# Altium PCB 28Pins_Project_V1I1_PCB.PcbDoc (part 2 of 3)
Units mm, origin at the board's own origin, x right, y up, seen from the top; angles counter-clockwise.
Board outline 68.58 x 53.34 mm, 2 copper layers (L1, L2), stack 1.671 mm thick; 106 components, 71 nets, 323 pads, 106 vias.
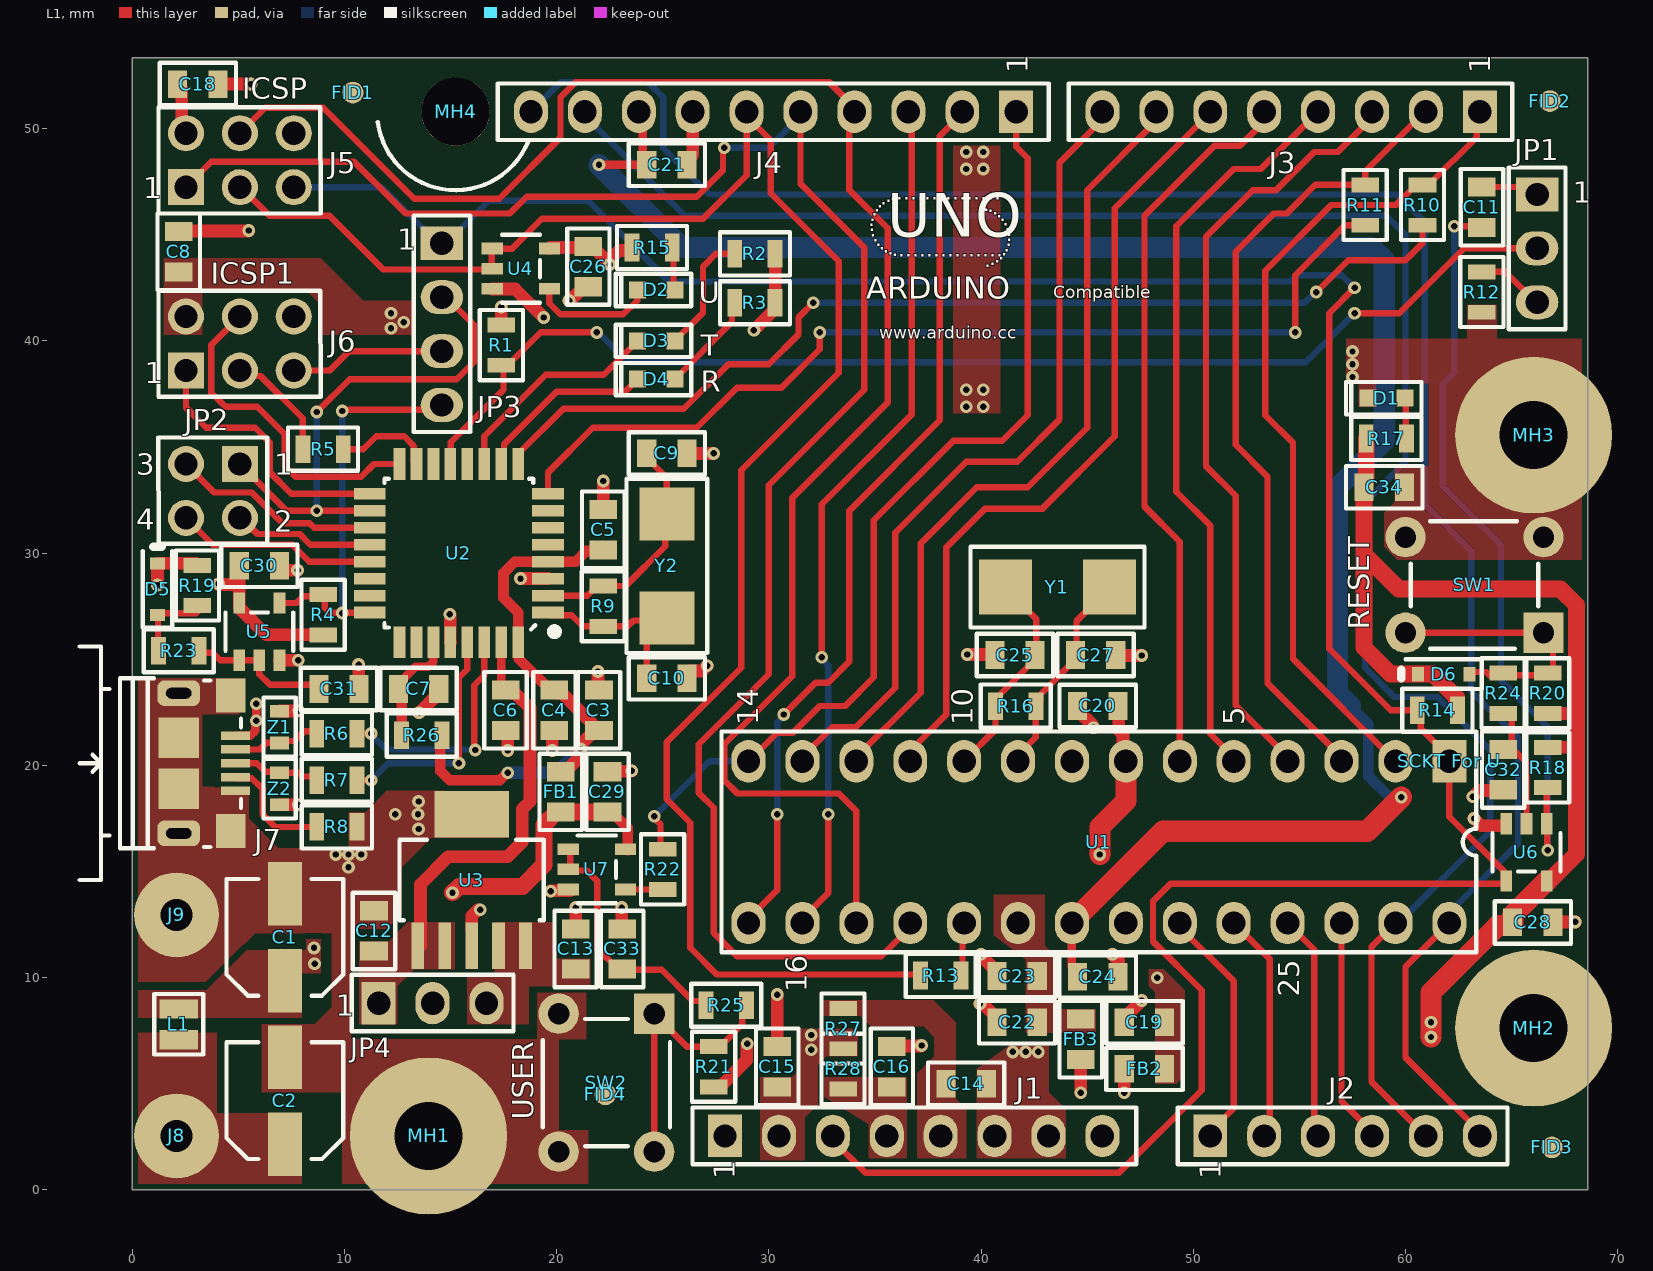
[diagram p0: L1 view]

## Part data (continued)
R4 R14 R18 R19 R20 R21: library part RC0805FR-0710KL, "Res Thick Film 0805 10K Ohm 1% 0.125W(1/8W) +/-100ppm/C Epoxy Pad SMD T/R", Case Code (Imperial)=0805, Case Code (Metric)=2012, Manufacturer=Yageo, Max Operating Temperature=155°C, Max Power Dissipation=125mW, Min Operating Temperature=-55°C, Package Quantity=1, Resistance Tolerance=1%, Resistor Type="Thick Film", Supplier Part Number=311-10.0KCRCT-ND, Temperature Coefficient=100ppm/°C, Voltage Rating=150V, Case/Package=0805, Category="Chip SMD Resistors", Construction=Rectangular, Depth=1.25mm, Features="Moisture Resistant", Height=0.024inch, Lead Free="Lead Free", Length=0.079inch, Manufacturer Part Number=RC0805FR-0710KL, Military Standard=Not, Number of Terminations=2, Packaging="Tape and Reel", Power Rating=125mW, Pricing="1=0.14, 10=0.016, 100=0.0112, 1000=0.00714 (USD)", Reach SVHC Compliant=Unknown, RoHS=Yes, RoHS Compliant=Yes, Series=RC, Stock=636782, Supplier=Digikey, Technology="THICK FILM", Termination=SMD/SMT, Tolerance=1%, Voltage Rating (AC)=150V, Width=0.049inch
R5 R6 R7 R13 R23 R24 R25: library part RC0805FR-0722RL, "SMD Chip Resistor, 22 Ohm, ± 1%, 125 mW, 0805 [2012 Metric], Thick Film, General Purpose", Manufacturer=Yageo, Supplier Part Number=311-22.0CRCT-ND, Voltage Rating (AC)=150V, Category="Chip SMD Resistors", ComponentLink1Description=https://datasheet.ciiva.com/11819/0900766b8106beab-11819837.pdf?src-supplier=Rs, ComponentLink1URL=https://datasheet.ciiva.com/11819/0900766b8106beab-11819837.pdf?src-supplier=Rs, ComponentLink2Description=https://datasheet.ciiva.com/2457/pyu-r-int-thick-7-2457045.pdf?src-supplier=Digikey, ComponentLink2URL=https://datasheet.ciiva.com/2457/pyu-r-int-thick-7-2457045.pdf?src-supplier=Digikey, ComponentLink3Description=https://datasheet.ciiva.com/2457/pyu-r-int-thick-7-2457046.pdf?src-supplier=Digikey, ComponentLink3URL=https://datasheet.ciiva.com/2457/pyu-r-int-thick-7-2457046.pdf?src-supplier=Digikey, ComponentLink4Description=https://datasheet.ciiva.com/12667/rc0805-12667371.pdf?src-supplier=Mouser, ComponentLink4URL=https://datasheet.ciiva.com/12667/rc0805-12667371.pdf?src-supplier=Mouser, ComponentLink5Description=https://datasheet.ciiva.com/2457/pyu-r-int-thick-7-2457044.pdf?src-supplier=Digikey, ComponentLink5URL=https://datasheet.ciiva.com/2457/pyu-r-int-thick-7-2457044.pdf?src-supplier=Digikey, ComponentLink6Description=https://datasheet.ciiva.com/46447/444164-46447574.pdf?src-supplier=Element14, ComponentLink6URL=https://datasheet.ciiva.com/46447/444164-46447574.pdf?src-supplier=Element14, Lead Free=5697LeadFree, Manufacturer Part Number=RC0805FR-0722RL, Pricing="1=0.1, 10=0.012, 100=0.0112, 1000=0.00918, 2500=0.00652 (USD)", RoHS=Yes, Stock=257864, Supplier=Digikey
R8 R26 R27 R28: library part RC0805JR-070RL, "GENERAL PURPOSE CHIP RESISTOR Metal Glaze/thick Film, 0.125W, 0ohm, Surface Mount, 0805", Case Code (Imperial)=0805, Case Code (Metric)=2012, Manufacturer=Yageo, Max Operating Temperature=155°C, Max Power Dissipation=125mW, Min Operating Temperature=-55°C, Resistance Tolerance=5%, Resistor Type="Thick Film", Supplier Part Number=311-0.0ARCT-ND, Temperature Coefficient=200ppm/°C, Voltage Rating=150V, Case/Package=0805, Category="Chip SMD Resistors", ComponentLink1Description=https://datasheet.ciiva.com/11819/0900766b8106beab-11819430.pdf?src-supplier=Rs, ComponentLink1URL=https://datasheet.ciiva.com/11819/0900766b8106beab-11819430.pdf?src-supplier=Rs, ComponentLink2Description=https://datasheet.ciiva.com/7941/1738694-7941861.pdf?src-supplier=Element14, ComponentLink2URL=https://datasheet.ciiva.com/7941/1738694-7941861.pdf?src-supplier=Element14, ComponentLink3Description=https://datasheet.ciiva.com/7941/1738694-7941862.pdf?src-supplier=Element14, ComponentLink3URL=https://datasheet.ciiva.com/7941/1738694-7941862.pdf?src-supplier=Element14, ComponentLink4Description=https://datasheet.ciiva.com/7941/1738694-7941863.pdf?src-supplier=Element14, ComponentLink4URL=https://datasheet.ciiva.com/7941/1738694-7941863.pdf?src-supplier=Element14, Construction=Rectangular, Contact Plating=Tin,Matte, Depth=1.25mm, Features="Moisture Resistant", Height=0.5mm, Lead Free=5697LeadFree, Length=2mm, Manufacturer Part Number=RC0805JR-070RL, Military Standard=Not, Number of Terminations=2, Packaging="Tape and Reel", Pins=2, Power Rating=125mW, Pricing="1=0.1, 10=0.015, 25=0.0128, 50=0.011, 100=0.0097, 250=0.00812, 500=0.00716, 1000=0.00633 (USD)", Reach SVHC Compliant=Unknown, RoHS=Yes, RoHS Compliant=Yes, Series=RC, Stock=729669, Supplier=Digikey, Technology="THICK FILM", Termination=SMD/SMT, Tolerance=5%, Voltage Rating (DC)=150V, Width=1.25mm
R9 R16: library part RC0805FR-071ML, "125Mw Thick Film Resistors 100Ppm/ 1% 1M 0805 Chip Resistor Surface Mount Rohs", Case Code (Imperial)=0805, Case Code (Metric)=2012, Case/Package=Molded, Manufacturer=Yageo, Max Operating Temperature=155°C, Min Operating Temperature=-55°C, Power Rating=125mW, Resistance Tolerance=1%, Resistor Type="Thick Film", Supplier Part Number=311-1.00MCRCT-ND, Temperature Coefficient=250ppm/°C, Voltage Rating=150V, Category="Chip SMD Resistors", ComponentLink1Description=https://datasheet.ciiva.com/2519/pyu-r-int-thick-7-2519712.pdf?src-supplier=Digikey, ComponentLink1URL=https://datasheet.ciiva.com/2519/pyu-r-int-thick-7-2519712.pdf?src-supplier=Digikey, ComponentLink2Description=https://datasheet.ciiva.com/2519/pyu-r-int-thick-7-2519713.pdf?src-supplier=Digikey, ComponentLink2URL=https://datasheet.ciiva.com/2519/pyu-r-int-thick-7-2519713.pdf?src-supplier=Digikey, ComponentLink3Description=https://datasheet.ciiva.com/2519/pyu-r-int-thick-7-2519711.pdf?src-supplier=Digikey, ComponentLink3URL=https://datasheet.ciiva.com/2519/pyu-r-int-thick-7-2519711.pdf?src-supplier=Digikey, ComponentLink4Description=https://datasheet.ciiva.com/12666/rc0805-12666975.pdf?src-supplier=Mouser, ComponentLink4URL=https://datasheet.ciiva.com/12666/rc0805-12666975.pdf?src-supplier=Mouser, ComponentLink5Description=https://datasheet.ciiva.com/17419/rc0805-17419909.pdf?src-supplier=Future+Electronics, ComponentLink5URL=https://datasheet.ciiva.com/17419/rc0805-17419909.pdf?src-supplier=Future+Electronics, Construction=Rectangular, Depth=1.25mm, Lead Free="Lead Free", Length=2mm, Manufacturer Part Number=RC0805FR-071ML, Military Standard=Not, Packaging="Tape and Reel", Pricing="1=0.1, 10=0.014, 100=0.0112, 1000=0.00918, 2500=0.00617 (USD)", Reach SVHC Compliant=Unknown, RoHS=Yes, RoHS Compliant=Yes, Stock=175670, Supplier=Digikey, Tolerance=1%, Voltage Rating (AC)=150V
R10 R11 R12: library part RC0805FR-071KL, "125Mw Thick Film Resistors 100Ppm/ 1% 1K 0805 Chip Resistor Surface Mount Rohs", Case Code (Imperial)=0805, Case Code (Metric)=2012, Manufacturer=Yageo, Max Operating Temperature=155°C, Max Power Dissipation=125mW, Min Operating Temperature=-55°C, Package Quantity=1, Resistance Tolerance=1%, Resistor Type="Thick Film", Supplier Part Number=311-1.00KCRCT-ND, Temperature Coefficient=100ppm/°C, Voltage Rating=150V, Case/Package=0805, Category="Chip SMD Resistors", ComponentLink1Description=https://datasheet.ciiva.com/7941/1686128-7941719.pdf?src-supplier=Element14, ComponentLink1URL=https://datasheet.ciiva.com/7941/1686128-7941719.pdf?src-supplier=Element14, ComponentLink2Description=https://datasheet.ciiva.com/46385/444164-46385020.pdf?src-supplier=Element14, ComponentLink2URL=https://datasheet.ciiva.com/46385/444164-46385020.pdf?src-supplier=Element14, ComponentLink3Description=https://datasheet.ciiva.com/2456/pyu-r-int-thick-7-2456976.pdf?src-supplier=Digikey, ComponentLink3URL=https://datasheet.ciiva.com/2456/pyu-r-int-thick-7-2456976.pdf?src-supplier=Digikey, ComponentLink4Description=https://datasheet.ciiva.com/2456/pyu-r-int-thick-7-2456977.pdf?src-supplier=Digikey, ComponentLink4URL=https://datasheet.ciiva.com/2456/pyu-r-int-thick-7-2456977.pdf?src-supplier=Digikey, ComponentLink5Description=https://datasheet.ciiva.com/2456/pyu-r-int-thick-7-2456975.pdf?src-supplier=Digikey, ComponentLink5URL=https://datasheet.ciiva.com/2456/pyu-r-int-thick-7-2456975.pdf?src-supplier=Digikey, ComponentLink6Description=https://datasheet.ciiva.com/16850/rc0805-16850409.pdf?src-supplier=Future+Electronics, ComponentLink6URL=https://datasheet.ciiva.com/16850/rc0805-16850409.pdf?src-supplier=Future+Electronics, Construction=Rectangular, Depth=1.25mm, Features="Moisture Resistant", Height=0.024inch, Lead Free="Lead Free", Length=0.079inch, Manufacturer Part Number=RC0805FR-071KL, Military Standard=Not, Number of Terminations=2, Packaging="Tape and Reel", Pins=2, Power Rating=125mW, Pricing="1=0.1, 10=0.012, 100=0.0112, 1000=0.00714 (USD)", Reach SVHC Compliant=No, RoHS=Yes, RoHS Compliant=Yes, Series=RC, Stock=614745, Supplier=Digikey, Termination=SMD/SMT, Tolerance=1%, Voltage Rating (AC)=150V, Voltage Rating (DC)=150V, Width=0.049inch
"SCKT For U": library part 4828-3004-CP, "Socket DIP 28Cnts DualWipe 0.3InSpc. PhosphorBronze Nickel KinkedTail 4800Series", Manufacturer=3M, Supplier Part Number=3M5480-ND, Category=Connectors, ComponentLink1Description=https://datasheet.ciiva.com/768/ts1099-768354.pdf?src-supplier=Digikey, ComponentLink1URL=https://datasheet.ciiva.com/768/ts1099-768354.pdf?src-supplier=Digikey, Manufacturer Part Number=4828-3004-CP, Pricing="1=0.96, 14=0.79786, 28=0.75929, 56=0.72304, 112=0.68848, 252=0.65016, 504=0.61911, 1008=0.58954, 2506=0.55285 (USD)", RoHS=Yes, Stock=5364, Supplier=Digikey
SW1 SW2: "Switch Tactile OFF (ON) SPST Round Button PC Pins 0.05A 24VDC 1.57N Thru-Hole Loose", Color=46Colour, Contact Current Rating=50mA, Insulation Resistance=100MR, Manufacturer="TE Connectivity Alcoswitch", Max Operating Temperature=85°C, Max Voltage Rating (DC)=24V, Min Operating Temperature=-35°C, Operating Force=160gf, Supplier Part Number=450-1650-ND, Actuator Length=0.055inch, Actuator Material=PBT, Actuator Type=Standard, Category="Pushbutton Switches", Contact Material="Copper Alloy", Contact Plating=Silver, Current Rating=50mA, ELV=5681ELVCompliant, Illumination Type=Non-Illuminated,Illuminated, Lead Free=5697LeadFree, Length=5.99mm, Manufacturer Part Number=1825910-6, Material=4261ConductorMaterial, Max Current Rating=50mA, Mechanical Life=100000Cycles, Mounting Technology="Through Hole", Number of Positions=2NUMBER, Packaging="Loose Piece", Pricing="1=0.13, 10=0.118, 25=0.1112, 100=0.1001, 250=0.093, 750=0.08485, 1500=0.08009, 3000=0.07565, 5250=0.07234 (USD)", Reach SVHC Compliant=Unknown, RoHS=Yes, RoHS Compliant=Yes, Series=FSMJ, Stock=34175, Supplier=Digikey, Switch Function=Off-Mom, Switch Travel=0.25mm, Termination="PC Pins", Throw Configuration=SPST, Type=Switch, Width=6mm
U1: "Microchip - ATMEGA328P-PU - Microcontroller Mcu, 8 Bit, Atmega, 20MHZ, DIP-28", Case/Package="28-DIP (0.300\", 7.62mm)", Clock Frequency=20MHz, Manufacturer=Microchip, Max Operating Temperature=85°C, Max Supply Voltage=5.5V, Min Operating Temperature=-40°C, Min Supply Voltage=1.8V, Package Quantity=14, Supplier Part Number=ATMEGA328P-PU-ND, Category=Microcontrollers, ComponentLink1Description=https://datasheet.ciiva.com/19457/2139111-19457070.pdf?src-supplier=Jameco, ComponentLink1URL=https://datasheet.ciiva.com/19457/2139111-19457070.pdf?src-supplier=Jameco, ComponentLink2Description=https://datasheet.ciiva.com/1157/1684409-1157696.pdf?src-supplier=Element14, ComponentLink2URL=https://datasheet.ciiva.com/1157/1684409-1157696.pdf?src-supplier=Element14, ComponentLink3Description=https://datasheet.ciiva.com/29119/155197-da-01-en-microcontr-atmega328p-pu-8bit-pdip-28-29119593.pdf?src-supplier=Conrad, ComponentLink3URL=https://datasheet.ciiva.com/29119/155197-da-01-en-microcontr-atmega328p-pu-8bit-pdip-28-29119593.pdf?src-supplier=Conrad, ComponentLink4Description=https://datasheet.ciiva.com/15213/getdatasheetpartid-318533-15213133.pdf?src-supplier=Verical, ComponentLink4URL=https://datasheet.ciiva.com/15213/getdatasheetpartid-318533-15213133.pdf?src-supplier=Verical, Core Architecture=AVR, Data Bus Width=8b, Frequency=20MHz, Height=4.57mm, Interface=I2C,SPI,USART,UART,2-Wire, Lead Free=5697LeadFree, Length=34.8mm, Manufacturer Part Number=ATMEGA328P-PU, Memory Format=FLASH, Memory Size=32KB, Mounting Technology="Through Hole", Number of ADC Channels=6, Number of I2C Channels=1, Number of I/Os=23, Number of PWM Channels=6, Number of SPI Channels=1, Number of Timers/Counters=3, Oscillator Type=Internal, Packaging=Rail/Tube, Peripherals="Brown-out Detect/Reset,POR,PWM,WDT", Pins=28, Pricing="1=2.89, 25=2.65, 100=2.39 (USD)", Radiation Hardening=No, RAM Size=2KB, Reach SVHC Compliant=No, RoHS=Yes, RoHS Compliant=Yes, Series=ATmega328P, Stock=88034, Supplier=Digikey, Weight=0.077603oz, Width=7.49mm
U2: library part ATMEGA16U2-AU, "Risc Microcontroller, 8-BIT, Flash, AVR Risc Cpu, 16MHZ, Cmos, PQFP32", Case/Package=32-TQFP, Clock Frequency=16MHz, Manufacturer=Microchip, Max Operating Temperature=85°C, Max Supply Voltage=5.5V, Min Operating Temperature=-40°C, Min Supply Voltage=2.7V, Package Quantity=250, Category=Microcontrollers, ComponentLink1Description=https://datasheet.ciiva.com/13036/doc7799-28769-13036800.pdf?src-supplier=Mouser, ComponentLink1URL=https://datasheet.ciiva.com/13036/doc7799-28769-13036800.pdf?src-supplier=Mouser, ComponentLink2Description=https://datasheet.ciiva.com/22651/doc7799-22651110.pdf?src-supplier=Farnell, ComponentLink2URL=https://datasheet.ciiva.com/22651/doc7799-22651110.pdf?src-supplier=Farnell, Core Architecture=AVR, Data Bus Width=8b, Frequency=16MHz, Height=1mm, Interface=SPI,UART,USB,USART,Serial, Lead Free="Lead Free", Length=7mm, Manufacturer Part Number=ATMEGA16U2-AU, Memory Format=FLASH, Memory Size=16KB, Mounting Technology="Surface Mount", Number of I/Os=22, Number of PWM Channels=5, Number of SPI Channels=1, Number of Timers/Counters=2, Oscillator Type=Internal, Packaging=Tray, Peripherals="Brown-out Detect/Reset,POR,PWM,WDT", Pins=32, Pricing="1=3.24, 25=2.97, 100=2.7 (USD)", RAM Size=512B, Reach SVHC Compliant=No, RoHS=Yes, RoHS Compliant=Yes, Series=ATmega16U2, Stock=30250, Supplier=Digikey, Supplier Part Number=ATMEGA16U2-AU-ND, Weight=0.002568oz, Width=7mm
U3: "LDO Regulator Pos 3.3V 1.5A 6-Pin(5+Tab) SOT-223 T/R", Case/Package=SOT-223-6, Dropout Voltage=340mV, Input Bias Current=1mA, Manufacturer="Texas Instruments", Max Operating Temperature=125°C, Max Output current=1.5A, Max Output Voltage=3.3V, Max Supply Voltage=20V, Min Current Limit=1.6A, Min Input Voltage=2.1V, Min Operating Temperature=-40°C, Package Quantity=1, Supplier Part Number=296-24534-1-ND, Accuracy=3%, Category="Voltage Regulators - Linear", ComponentLink1Description=https://datasheet.ciiva.com/2046/tl1963a-2046162.pdf?src-supplier=Digikey, ComponentLink1URL=https://datasheet.ciiva.com/2046/tl1963a-2046162.pdf?src-supplier=Digikey, ComponentLink2Description=https://datasheet.ciiva.com/2046/tl1963a-2046161.pdf?src-supplier=Digikey, ComponentLink2URL=https://datasheet.ciiva.com/2046/tl1963a-2046161.pdf?src-supplier=Digikey, ComponentLink3Description=https://datasheet.ciiva.com/2046/tl1963a-2046163.pdf?src-supplier=Digikey, ComponentLink3URL=https://datasheet.ciiva.com/2046/tl1963a-2046163.pdf?src-supplier=Digikey, Lead Free="Lead Free", Manufacturer Part Number=TL1963A-33DCQR, Min Output Voltage=3.3V, Number of Outputs=1, Number of Regulators=1, Output Current=1.5A, Output Type=Fixed, Output Voltage=3.3V, Packaging="Tape and Reel", Pins=6, Polarity=Positive, Pricing="1=3.3, 10=2.479, 25=2.2736, 100=2.0475, 250=1.93968, 500=1.87468, 1000=1.82118 (USD)", Quiescent Current=1mA, Radiation Hardening=No, RoHS=Yes, RoHS Compliant=Yes, Series=-, Stock=8366, Supplier=Digikey
U4 U5 U6 U7: "1-ch, 2-input 2-V to 5.5-V high-speed (9 ns) AND gate with open-drain outputs 5-SOT-23 -55 to 125", Case/Package=SOT-23, Low Level Output Current=8mA, Manufacturer="Texas Instruments", Max Operating Temperature=125°C, Max Supply Voltage=5.5V, Min Operating Temperature=-55°C, Min Supply Voltage=2V, Nominal Supply Current=1uA, Output Current=25mA, Package Quantity=3000, Supplier Part Number=296-29202-1-ND, Category="Logic Gates", ComponentLink1Description=https://datasheet.ciiva.com/1864/sn74ahc1g09-1864411.pdf?src-supplier=Digikey, ComponentLink1URL=https://datasheet.ciiva.com/1864/sn74ahc1g09-1864411.pdf?src-supplier=Digikey, ComponentLink2Description=https://datasheet.ciiva.com/1864/sn74ahc1g09-1864410.pdf?src-supplier=Digikey, ComponentLink2URL=https://datasheet.ciiva.com/1864/sn74ahc1g09-1864410.pdf?src-supplier=Digikey, ComponentLink3Description=https://datasheet.ciiva.com/1864/sn74ahc1g09-1864412.pdf?src-supplier=Digikey, ComponentLink3URL=https://datasheet.ciiva.com/1864/sn74ahc1g09-1864412.pdf?src-supplier=Digikey, Height=1.45mm, Lead Free="Lead Free", Length=2.9mm, Logic Function="AND GATE", Manufacturer Part Number=SN74AHC1G09DBVR, Mounting Technology="Surface Mount", Number of Bits=1, Number of Channels=1NUMBER, Number of Circuits=1, Number of Elements=1, Number of Gates=1, Number of Inputs=2, Number of Outputs=1, Output Voltage=5.5V, Packaging="Tape and Reel", Pins=5, Pricing="1=0.12, 10=0.077, 25=0.0672, 100=0.0566, 250=0.05148, 500=0.04844, 1000=0.04592 (USD)", Propagation Delay=7.5ns, Quiescent Current=1uA, Radiation Hardening=No, Reach SVHC Compliant=No, RoHS=Yes, RoHS Compliant=Yes, Series=74AHC, Supplier=Digikey, Technology=CMOS, Thickness=1.2mm, Width=1.6mm
Y1 Y2: "Crystal 16MHz ±20ppm (Tol) ±30ppm (Stability) 18pF FUND 50Ohm 2-Pin Mini-CSMD T/R", Case/Package=CSMD, ESR (Equivalent Series Resistance)=50R, Frequency=16MHz, Frequency Stability=30ppm, Frequency Tolerance=20ppm, Load Capacitance=18pF, Manufacturer=Abracon, Max Operating Temperature=85°C, Min Operating Temperature=-40°C, Operating Frequency="16 MHz", Package Quantity=1000, Supplier Part Number=535-9840-1-ND, Category=Crystals, ComponentLink1Description=https://datasheet.ciiva.com/15116/getdatasheetpartid-721624-15116835.pdf?src-supplier=Verical, ComponentLink1URL=https://datasheet.ciiva.com/15116/getdatasheetpartid-721624-15116835.pdf?src-supplier=Verical, ComponentLink2Description=https://datasheet.ciiva.com/5788/abm7-5788054.pdf?src-supplier=Farnell, ComponentLink2URL=https://datasheet.ciiva.com/5788/abm7-5788054.pdf?src-supplier=Farnell, ComponentLink3Description=https://datasheet.ciiva.com/7998/947971-7998600.pdf?src-supplier=Element14, ComponentLink3URL=https://datasheet.ciiva.com/7998/947971-7998600.pdf?src-supplier=Element14, ComponentLink4Description=https://datasheet.ciiva.com/22658/947971-22658293.pdf?src-supplier=Element14, ComponentLink4URL=https://datasheet.ciiva.com/22658/947971-22658293.pdf?src-supplier=Element14, ComponentLink5Description=https://datasheet.ciiva.com/46385/947971-46385243.pdf?src-supplier=Element14, ComponentLink5URL=https://datasheet.ciiva.com/46385/947971-46385243.pdf?src-supplier=Element14, ComponentLink6Description=https://datasheet.ciiva.com/18649/abm7-18649866.pdf?src-supplier=Digikey, ComponentLink6URL=https://datasheet.ciiva.com/18649/abm7-18649866.pdf?src-supplier=Digikey, ComponentLink7Description=https://datasheet.ciiva.com/18649/abm7-18649865.pdf?src-supplier=Digikey, ComponentLink7URL=https://datasheet.ciiva.com/18649/abm7-18649865.pdf?src-supplier=Digikey, ComponentLink8Description=https://datasheet.ciiva.com/18649/abm7-18649867.pdf?src-supplier=Digikey, ComponentLink8URL=https://datasheet.ciiva.com/18649/abm7-18649867.pdf?src-supplier=Digikey, ComponentLink9Description=https://datasheet.ciiva.com/16383/abm7-16383174.pdf?src-supplier=Future+Electronics, ComponentLink9URL=https://datasheet.ciiva.com/16383/abm7-16383174.pdf?src-supplier=Future+Electronics, ComponentLink10Description=https://datasheet.ciiva.com/26941/getdatasheetpartid-719818-26941724.pdf?src-supplier=Verical, ComponentLink10URL=https://datasheet.ciiva.com/26941/getdatasheetpartid-719818-26941724.pdf?src-supplier=Verical, Depth=3.5mm, Height=1.4mm, Lead Free="Lead Free", Length=6mm, Manufacturer Part Number=ABM7-16.000MHZ-D2Y-T, Mounting Technology="Surface Mount", Packaging="Tape and Reel", Pins=2, Pricing="1=0.66, 10=0.573, 50=0.5196, 100=0.4981, 500=0.45152 (USD)", Reach SVHC Compliant=Unknown, RoHS=Yes, Series=ABM7, Stock=27866, Supplier=Digikey, Termination=SMD/SMT, Tolerance=20ppm, Width=3.3mm
Z1 Z2: "ESD Suppressor Multilayer Varistor 5V Automotive 2-Pin Case 0603(1608Metric) T/R", Case Code (Imperial)=0603, Case Code (Metric)=1608, Clamping Voltage=20V, Current Rating=50nA, Manufacturer=Bourns, Max Operating Temperature=85°C, Max Voltage Rating (DC)=5V, Min Operating Temperature=-40°C, Package Quantity=1, Supplier Part Number=CG0603MLC-05ECT-ND, Voltage Rating (AC)=8V, Case/Package=0603, Category=Varistors, ComponentLink1Description=https://datasheet.ciiva.com/27747/1163231-27747629.pdf?src-supplier=Jameco, ComponentLink1URL=https://datasheet.ciiva.com/27747/1163231-27747629.pdf?src-supplier=Jameco, ComponentLink2Description=https://datasheet.ciiva.com/8084/mlc-8084047.pdf?src-supplier=Avnet, ComponentLink2URL=https://datasheet.ciiva.com/8084/mlc-8084047.pdf?src-supplier=Avnet, ComponentLink3Description=https://datasheet.ciiva.com/6991/mlc-6991834.pdf?src-supplier=Digikey, ComponentLink3URL=https://datasheet.ciiva.com/6991/mlc-6991834.pdf?src-supplier=Digikey, ComponentLink4Description=https://datasheet.ciiva.com/6991/mlc-6991836.pdf?src-supplier=Digikey, ComponentLink4URL=https://datasheet.ciiva.com/6991/mlc-6991836.pdf?src-supplier=Digikey, ComponentLink5Description=https://datasheet.ciiva.com/6991/mlc-6991832.pdf?src-supplier=Digikey, ComponentLink5URL=https://datasheet.ciiva.com/6991/mlc-6991832.pdf?src-supplier=Digikey, Contact Plating=Tin, Depth=0.8mm, Leakage Current=50nA, Length=1.6mm, Manufacturer Part Number=CG0603MLC-05E, Number of Channels=1, Number of Circuits=1, Operating Supply Voltage=5V, Packaging="Tape and Reel", Pins=2, Pricing="1=0.25, 10=0.169, 25=0.15, 100=0.1283, 250=0.11804, 500=0.11182, 1000=0.10671, 2500=0.10132 (USD)", Radiation Hardening=No, Reach SVHC Compliant=No, RoHS=Yes, RoHS Compliant=Yes, Series=MLC, Stock=26693, Supplier=Digikey, Termination=SMD/SMT, Thickness=0.8mm, Voltage=5V, Voltage Rating (DC)=5V, Width=0.8mm, Working Voltage=5V

## Via types
v1: diameter 0.6, hole 0.3, L1 to L2, tented both sides, 106 vias

## Nets (pads, with @x,y where several pads share a name; then routed paths per layer and width w, separated by ;. In a path a pad name is that pad's centre, name@x,y a point inside that pad or via, vN(x,y) a via of type N, cw(c..) or ccw(c..) an arc to the next point about the centre after c; other vN are vias at no path point)
16U2_16MHZ_XTAL1: C10.1 R9.1 U2.1 Y2.1 | length 9.3
  L1 w0.3: U2.1@19.6,27.2 19.725,27.075 20.725,27.075 21.25,26.55 23.35,26.55 23.626,26.826 25.076,26.826 Y2.1@25.2,26.95 24.25,26 C10.1@24.25,24.1
16U2_16MHZ_XTAL2: C9.2 R9.2 U2.2 Y2.2 | length 11.3
  L1 w0.3: U2.2@19.6,28 21.45,28 21.9,28.45 23.25,28.45 25.126,30.326 25.126,31.776 Y2.2@25.2,31.85 25.2,33.55 24.25,34.5 C9.2@24.25,34.7
16U2_BUF_RESETn: C31.2 R23.2 U5.1 U5.2 | length 6.5
  L1 w0.3: R23.2@3.15,25.4 3.25,25.3 3.8,25.3 4.15,24.95 U5.1@5.05,24.95 U5.2@6,24.95 6,24.3 6.5,23.8 C31.2@8.65,23.8
16U2_HDR_RESETn: J6.5 JP3.3 | length 7.4
  L1 w0.3: J6.5@7.62,38.608 9.308,38.608 10.22,39.52 JP3.3@14.6,39.52
16U2_MISO: J6.1 U2.17 | length 12.9
  L1 w0.3: J6.1@2.54,38.608 2.54,36.86 3.5,35.9 5.8,35.9 6.5,35.2 6.5,33.8 7.5,32.8 8.655,32.8 U2.17@11.2,32.8
16U2_MOSI: J6.4 U2.16 | length 15.8
  L1 w0.3: J6.4@5.08,41.148 3.74,39.808 3.74,37.56 4.4,36.9 5.9,36.9 7.2,35.6 7.2,34.1 7.7,33.6 10.8,33.6 11.4,34.2 U2.16@12.6,34.2
16U2_PB4: JP2.1 JP3.2 U2.18 | length 23.9
  L1 w0.3: JP2.1@5.08,34.2 7.28,32 U2.18@11.2,32 ; v1(8.7,36.65) 10.25,38.2 15.3,38.2 16.1,39 16.1,40.76 14.8,42.06 JP3.2@14.6,42.06
  L2 w0.3: v1(8.7,32) v1(8.7,36.65)
16U2_PB5: JP2.3 U2.19 | length 9.9
  L1 w0.3: JP2.3@2.54,34.2 3.88,32.86 5.64,32.86 7.1,31.4 8.381,31.4 8.581,31.2 U2.19@11.2,31.2
16U2_PB6: JP2.2 U2.20 | length 6.6
  L1 w0.3: JP2.2@5.08,31.66 5.15,31.66 5.91,30.9 7.9,30.9 8.4,30.4 U2.20@11.2,30.4
16U2_PB7: JP2.4 U2.21 | length 9.5
  L1 w0.3: JP2.4@2.54,31.66 3.8,30.4 7.545,30.4 8.345,29.6 U2.21@11.2,29.6
16U2_RESETn: JP3.4 R4.1 U2.24 U5.4 | length 19.4
  L1 w0.3: U5.4@6.95,27.65 7.75,27.65 8.076,27.976 8.926,27.976 R4.1@9,28.05 9.074,27.976 9.074,27.426 9.3,27.2 9.9,27.2 U2.24@11.2,27.2 ; v1(9.9,36.7) 9.957,36.757 14.377,36.757 JP3.4@14.6,36.98
  L2 w0.3: v1(9.9,27.175) v1(9.9,36.7)
16U2_RX_LED: D4.1 U2.10 | length 8.6
  L1 w0.3: U2.10@17.4,34.2 17.525,34.325 17.525,35.125 20,37.6 23.225,37.6 D4.1@23.825,38.2
16U2_RXD: R11.1 U2.8 | length 46.4
  L1 w0.3: U2.8@19.6,32.8 19.6,33.8 21.7,35.9 26.6,35.9 28.5,37.8 30.6,37.8 32.4,39.6 v1(32.4,40.4) ; v1(54.8,40.4) 54.8,43.1 57.15,45.45 R11.1@58.1,45.45
  L2 w0.3: v1(32.4,40.4) v1(54.8,40.4)
16U2_SCLK: J6.3 R5.2 | length 5.4
  L1 w0.3: J6.3@5.08,38.608 5.343,38.345 6.055,38.345 8.05,36.35 R5.2@8.05,34.9
16U2_SCLK_R: R5.1 U2.15 | length 4.7
  L1 w0.3: R5.1@9.95,34.9 10.9,34.9 11.5,35.5 12.82,35.5 13.275,35.045 13.275,34.325 U2.15@13.4,34.2
16U2_TX_LED: D3.1 U2.11 | length 10.4
  L1 w0.3: U2.11@16.6,34.2 16.6,35.5 19.5,38.4 22.225,38.4 D3.1@23.825,40
16U2_TXD: R10.1 U2.9 | length 48.5
  L1 w0.3: U2.9@18.2,34.2 18.2,34.675 20.325,36.8 26,36.8 28.1,38.9 30,38.9 31.4,40.3 31.4,41.1 v1(32.1,41.8) ; v1(55.8,42.3) 57.3,43.8 60,43.8 60.8,44.6 R10.1@60.8,45.45
  L2 w0.3: v1(32.1,41.8) 55.239,41.8 55.739,42.3 v1(55.8,42.3)
16U2PROG_328P_RESETn: JP1.2 R1.1 U2.13 | length 57.9
  L1 w0.3: U2.13@15,34.2 15.024,34.224 15.024,35.224 17.5,37.7 R1.1@17.5,38.85 ; R1.1@17.4,38.85 R1.1@17.5,38.85 ; v1(21.9,40.4) 19.25,40.4 17.7,38.85 R1.1@17.5,38.85 ; v1(57.6,41.3) 59.7,41.3 62.76,44.36 JP1.2@66.2,44.36
  L2 w0.3: v1(21.9,40.4) 21.961,40.4 23.361,39 55.3,39 v1(57.6,41.3)
328P_16MHZ_XTAL1: C27.1 R16.1 U1.9 Y1.1 | length 10
  L1 w0.3: U1.9@41.745,20.193 41.745,20.483 42.584,21.322 R16.1@42.584,22.792 42.784,22.992 42.784,23.334 44.45,25 C27.1@44.45,25.2 44.5,25.25 44.5,26.8 46.05,28.35 Y1.1@46.05,28.4
328P_16MHZ_XTAL2: C25.2 R16.2 U1.10 Y1.2 | length 10.2
  L1 w0.3: U1.10@39.205,20.193 39.205,20.213 40.684,21.692 R16.2@40.684,22.792 40.884,22.992 40.884,23.334 42.55,25 C25.2@42.55,25.2 42.6,25.25 42.6,26.9 41.15,28.35 Y1.2@41.15,28.4
328P_AUTORESETn: C11.1 R18.1 U6.1 | length 36
  L1 w0.3: v1(62.3,45.4) 63.55,45.4 C11.1@63.6,45.35 ; U6.1@66.65,17.25 66.65,18.75 66.75,18.85 R18.1@67.05,18.85 ; v1(66.7,16) 66.675,16.025 66.675,16.975 U6.1@66.7,17
  L2 w0.3: v1(62.3,45.4) 62.3,38.5 61.75,37.95 61.75,33.15 64.5,30.4 64.5,24 66.7,21.8 v1(66.7,16)
328P_BUF_RESETn: C32.2 R24.2 U6.2 | length 5.5
  L1 w0.3: R24.2@65,22.35 65,20.65 65.2,20.65 65.7,20.15 U6.2@65.7,17.25